# Altium PCB L-D5019-05-03.PcbDoc
Units mil, origin at the board's own origin, x right, y up, seen from the top; angles counter-clockwise.
Board outline 2874.02 x 1299.21 mil, 2 copper layers (Top Layer, Bottom Layer), stack 61.811 mil thick; 58 components, 38 nets, 174 pads, 53 vias.
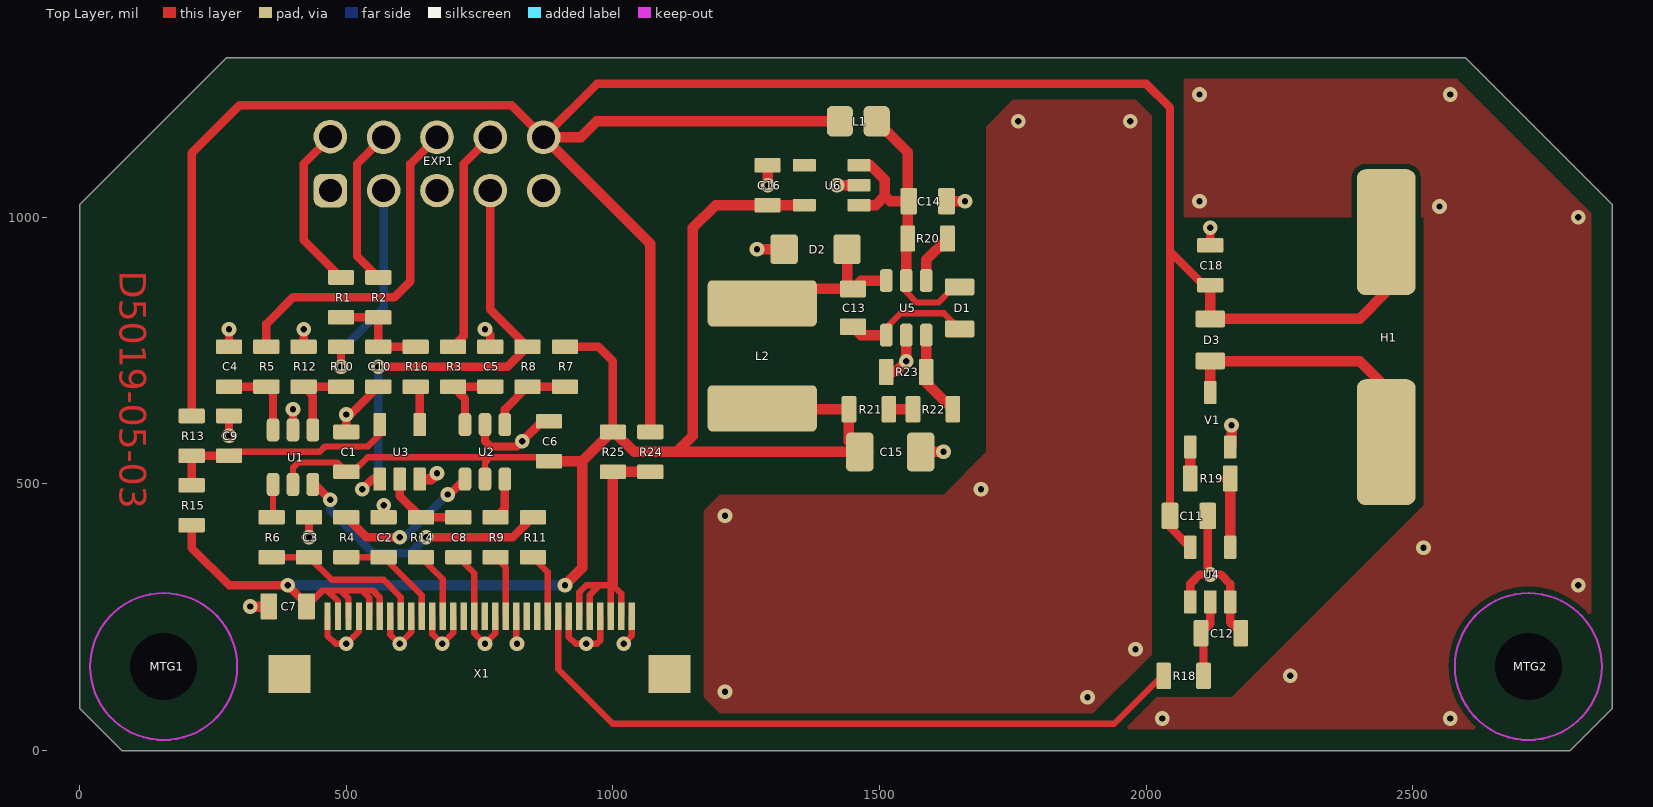
[diagram p0: Top Layer view]
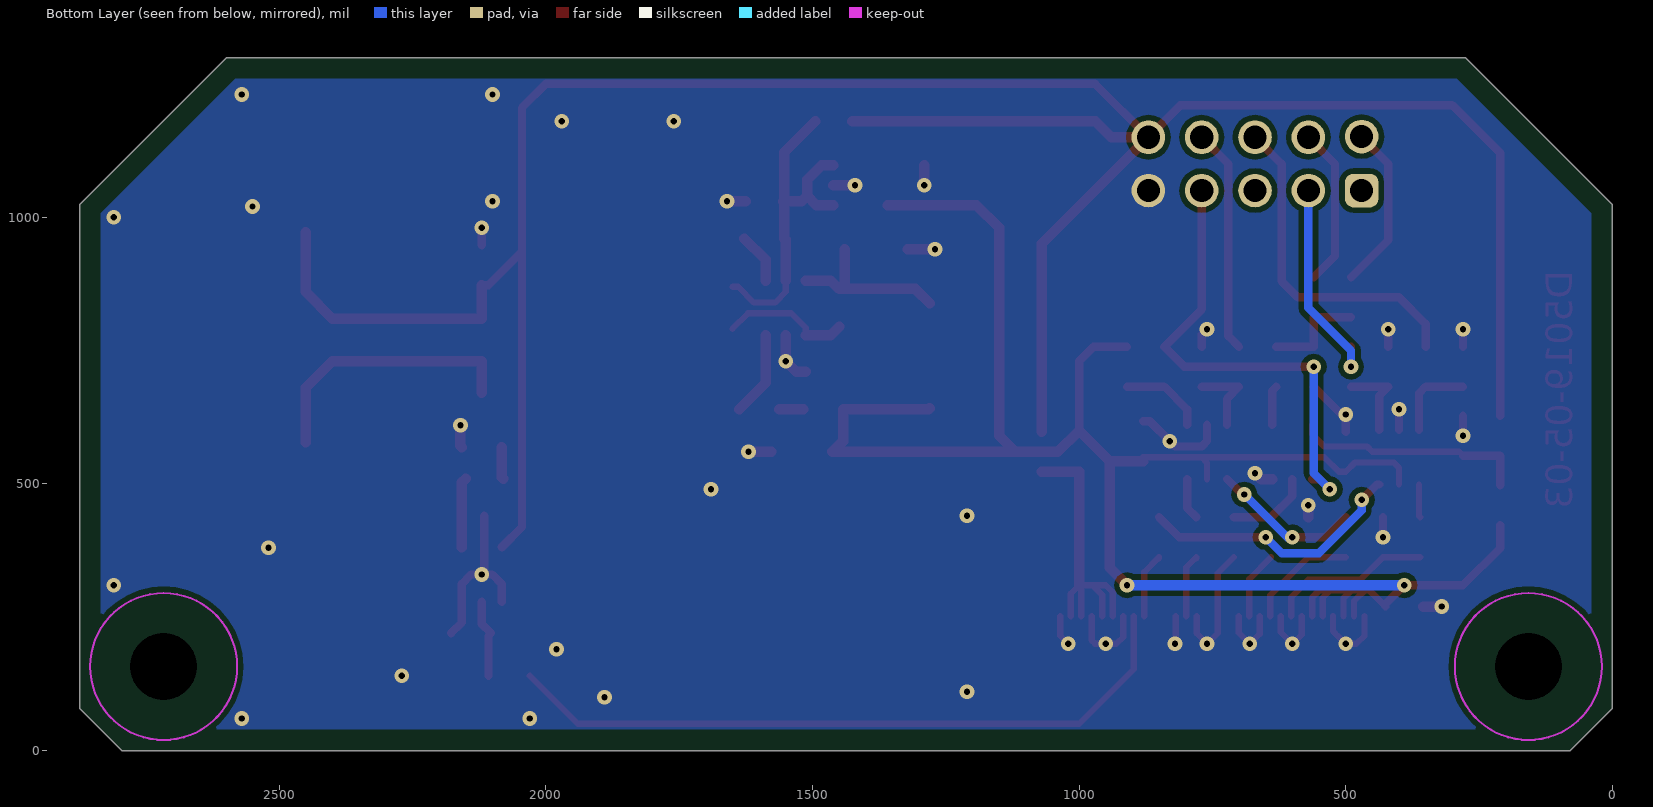
[diagram p1: Bottom Layer view, seen from below]
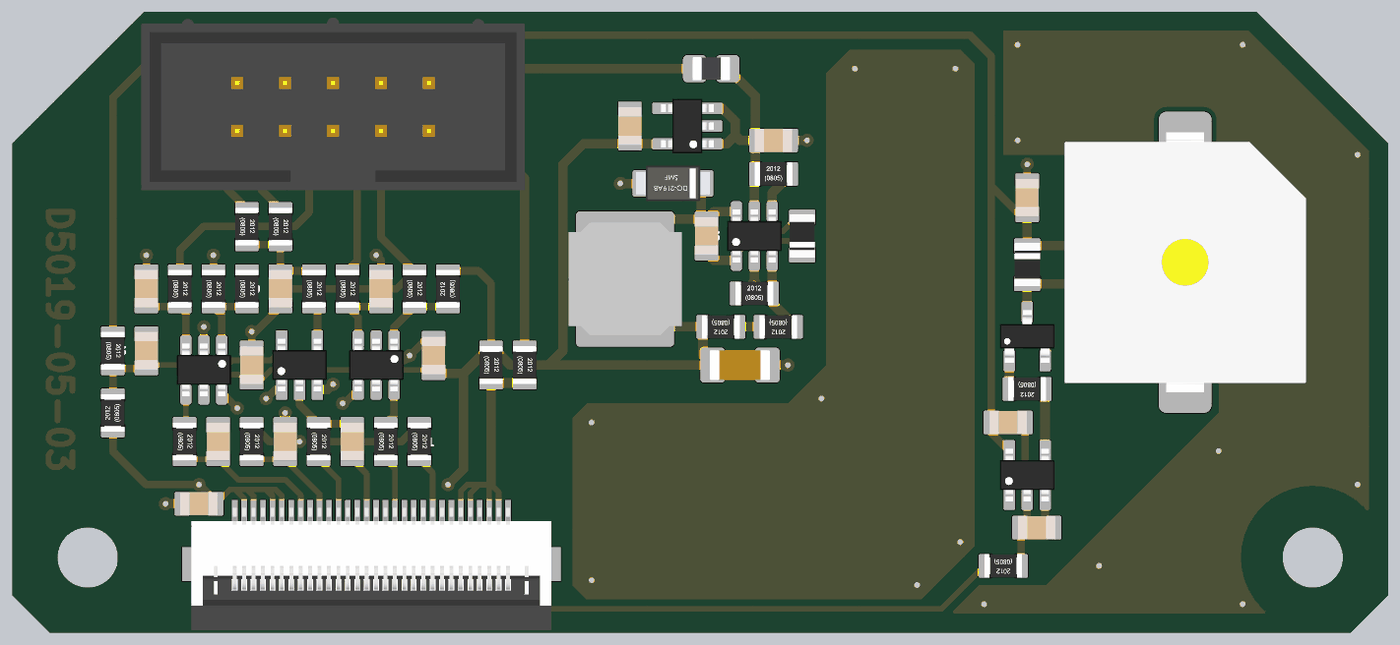
[diagram p2: 3D render of the assembled board from above, using the file's embedded part models]

## Layer stack, top to bottom
Top Solder: solder mask 0.3937, Solder Resist, Dk 3.5
Top Layer: signal copper 1.378
Dielectric 1: dielectric 59.0551, FR-4, Dk 4.8
Bottom Layer: signal copper 1.378
Bottom Solder: solder mask 0.3937, Solder Resist, Dk 3.5

## Board outline
78.74,0 0,78.74 0,1023.62 275.59,1299.21 2598.43,1299.21 2874.02,1023.62 2874.02,78.74 2795.28,0

## Design rules (kind name [scope] priority, off if disabled: settings)
BoardOutlineClearance [All] p1: gap=39.37 ignorepadtopadclearanceinfootprint=FALSE except(59.06: THPad-OutlineEdge THPad-CavityEdge THPad-CutoutEdge THPad-SplitBarrior THPad-SplitContinuation)
Clearance 16 [InNet('12V')] p1: gap=10 ignorepadtopadclearanceinfootprint=FALSE except(0: Arc-Hole Track-Hole SMDPad-Hole THPad-Hole Via-Hole Fill-Hole Poly-Hole Region-Hole Text-Hole; 16: Arc-Poly Track-Poly SMDPad-Poly THPad-Poly Via-Poly Fill-Poly Poly-Poly)
Clearance [All] p2: gap=6 ignorepadtopadclearanceinfootprint=FALSE except(0: Arc-Hole Track-Hole SMDPad-Hole THPad-Hole Via-Hole Fill-Hole Poly-Hole Region-Hole Text-Hole; 10: Arc-Poly Track-Poly SMDPad-Poly THPad-Poly Via-Poly Fill-Poly Poly-Poly) // 1
HoleSize [All] p1: absolutevalues=TRUE maxlimit=200 minlimit=11.81 maxpercent=80.000 minpercent=20.000
MinimumSolderMaskSliver [All] p1: minsoldermaskwidth=2
PasteMaskExpansion [All] p1 off: expansion=0
PolygonConnect [All] p1: connectstyle=Direct reliefconductorwidth=16 reliefentries=4 polygonreliefangle="90 Angle" airgapwidth=10
RoutingVias [All] p1: holewidth=11.81 width=23.62 viastyle="Through Hole" minholewidth=11.81 minwidth=23.62 maxholewidth=157.48 maxwidth=196.85
SilkToBoardRegionClearance [All] p1 off:
SilkToSilkClearance [All] p1 off: silktosilkclearance=10
SilkToSolderMaskClearance [IsPad] p1 off: minsilkscreentomaskgap=10 clearancetoexposedcopper=TRUE
SolderMaskExpansion [All] p1: expansion=2 istentingtop=FALSE
Width [All] p1: maxlimit=100 minlimit=8 preferedwidth=16 minimp=50.000000 maximp=50.000000 favimp=50.000000
24 further rules are at their usual default settings.

## Components (designator, comment, footprint, x,y, rotation, side; value= is the part's Value field where it differs from the comment)
C1 "100n" CAPC2012X14L#1 500,560 r270 top
C2 "22p" CAPC2012X14L#1 570,400 r270 top
C3 "22p" CAPC2012X14L#1 430,400 r270 top
C4 "22p" CAPC2012X14L#1 280,719.68 r270 top
C5 "22p" CAPC2012X14L#1 770,719.68 r270 top
C6 "100n" CAPC2012X14L#1 880,580 r270 top
C7 "4µ7" CAPC2012X14L#2 390,270 r0 top
C8 "22p" CAPC2012X14L#1 710,400 r90 top
C9 "100n" CAPC2012X14L#1 280,590 r270 top
C10 "22p" CAPC2012X14L#1 560,719.68 r90 top
C11 "100n" CAPC2012X14L#2 2080,440 r180 top
C12 "DNP" CAPC2012X14L#1 2140,220 r180 top
C13 "100n" CAPC2012X14L#2 1450,830 r90 top
C14 "4µ7" CAPC2012X14L#2 1590,1030 r180 top
C15 "22µF" CAPC3216X19N 1520,560 r180 top
C16 "4µ7" CAPC2012X14L#1 1290,1060 r270 top
C18 "4µ7" CAPC2012X14L#1 2120,910 r270 top
D1 "TS4148 RY" DIOC2012X10N 1650,830 r90 top
D2 "ES07D" DIOM2818X11N 1380,940 r180 top
D3 "TS4148 RY" DIOC2012X10N 2120,770 r270 top
EXP1 "2x5 2,54mm" PINH_2x5_2_54mm_shroud 670,1100 r0 top
H1 "CT-1205H-SMT" CT-1205H-SMT 2450,775 r270 top
L1 "0R0" INDC2012X10L 1460,1180 r0 top
L2 "VLS6045AF-4R7M" POWERINDUCTOR_6X6 1280,740 r270 top
MTG1 "MH_M3" HOLE_3_2MM 157.48,157.48 r0 top
MTG2 "MH_M3" HOLE_3_2MM 2716.54,157.48 r0 top
R1 "DNP" RESC2012X06L 490,849.68 r270 top
R2 "0R0" RESC2012X06L 560,849.68 r270 top
R3 "10R" RESC2012X06L 700,719.68 r270 top
R4 "10R" RESC2012X06L 500,400 r270 top
R5 "10R" RESC2012X06L 350,719.68 r270 top
R6 "10R" RESC2012X06L 360,400 r270 top
R7 "10k" RESC2012X06L 910,719.68 r90 top
R8 "10R" RESC2012X06L 840,719.68 r270 top
R9 "10R" RESC2012X06L 780,400 r270 top
R10 "10R" RESC2012X06L 490,719.68 r270 top
R11 "10R" RESC2012X06L 850,400 r270 top
R12 "10k" RESC2012X06L 420,719.68 r270 top
R13 "DNP" RESC2012X06L 210,590 r270 top
R14 "10R" RESC2012X06L 640,400 r270 top
R15 "0R0" RESC2012X06L 210,460 r90 top
R16 "10R" RESC2012X06L 630,719.68 r270 top
R18 "0r0" RESC2012X06L 2070,140 r180 top value=0R0
R19 "1k" RESC2012X06L 2120,510 r180 top
R20 "10k" RESC2012X06L 1590,960 r0 top
R21 "22k" RESC2012X06L 1480,640 r180 top
R22 "10k" RESC2012X06L 1600,640 r180 top
R23 "10k" RESC2012X06L 1550,710 r0 top
R24 "0R0" RESC2012X06L 1070,560 r270 top
R25 "DNP" RESC2012X06L 1000,560 r270 top
U1 "74LVC2G17" SOT95P280X110-6N 400,550 r270 top
U2 "74LVC2G17" SOT95P280X110-6N 760,560 r270 top
U3 "74VHC1GT125" SOT95P280X110-5N 600,560 r90 top
U4 "74VHC1GT125" SOT95P280X110-5N 2120,330 r90 top
U5 "RT8259GE" SOT95P280X110-6N 1550,830 r90 top
U6 "MIC5504-3.3YM5" SOT95P280X110-5N 1410,1060 r180 top
V1 "BC817" SOT95P280X110-3N 2120,620 r90 top
X1 "WE_687130149022" WE_687130149022 750,120 r0 top

## Footprints (in the part's own frame and the unit in brackets; to place one, negate y for a bottom-side part, rotate by r counter-clockwise, add the part's x,y. Pads: shape width x height; smd on the part's side, far side on the other; paste and mask are expansions set on the pad)
CAPC2012X14L#1 [mm] "Chip Capacitor, 2-Leads, Body 2,0x1,3mm, IPC High Density"
  rrect20% 0.7x1.25 smd: 1(-0.95,0) 2(0.95,0)
  body extent -1,-0.62 1,0.62, height 0.6
CAPC2012X14L#2 [mm] "Chip Capacitor, 2-Leads, Body 2,0x1,3mm, IPC High Density"
  rrect20% 0.8x1.25 smd: 1(-0.9,0) 2(0.9,0)
  body extent -1,-0.62 1,0.62, height 0.6
CAPC3216X19N [mm] "Chip Capacitor, 2-Leads, Body 3,2x1,6mm, IPC Medium Density"
  rrect30% 1.3x1.85 smd: 1(-1.45,0) 2(1.45,0)
  body extent -1.6,-0.8 1.6,0.8, height 1
CT-1205H-SMT [mm] "Speaker"
  rrect30% 6x2.8 smd: 1(-5,0) 2(5,0)
  body extent -6.9,-6.4 6.9,6.4, height 10
DIOC2012X10N [mm] "Chip Diode, 2-Leads, Body 2,0x1,3mm, IPC Medium Density"
  rrect20% 0.8x1.4 smd: 1(-1,0) 2(1,0)
  body extent -1.15,-0.68 1.15,0.68, height 0.76
DIOM2818X11N [mm] "Molded Diode, 2-Leads, Body 2,80x1,80mm, IPC Medium Density"
  rrect20% 1.3x1.4 smd: 1(-1.5,0) 2(1.5,0)
  body extent -1.95,-0.95 1.95,0.95, height 1.25
HOLE_3_2MM [mm] "Mouting-Hole for screws M3 with keepout for washer"
  round 0 hole 3.2 unplated: 1(0,0)
  Keep-Out Layer circle w0.1: c0,0 r3.5
INDC2012X10L [mm] "Ferrite Bead, 2-Leads, Body 2,0x1,3mm, IPC High Density"
  rrect40% 1.25x1.45 smd: 1(-0.875,0) 2(0.875,0)
  body extent -1,-0.62 1,0.62, height 0.85
PINH_2x5_2_54mm_shroud [mm] "10 pins, straight, gold plating"
  rrect50% 1.6x1.6 hole 1.1: 1(-5.08,-1.27)
  round 1.6 hole 1.1: 2(-5.08,1.3) 3(-2.54,-1.27) 4(-2.54,1.27) 5(0,-1.27) 6(0,1.27) 7(2.54,-1.27) 8(2.54,1.27) 9(5.08,-1.27) 10(5.08,1.27)
  body extent -10.18,-4.42 10.18,4.75, height 9.13
POWERINDUCTOR_6X6 [mm] "SMD Inductor, 2-Leads, Body 6,0x6.0mm"
  rrect20% 2.2x5.2 smd: 1(-2.5,0) 2(2.5,0)
  body extent -3,-3 3,3, height 4
RESC2012X06L [mm] "Chip Resistor, 2-Leads, Body 2,0x1,3mm, IPC High Density"
  rrect20% 0.7x1.25 smd: 1(-0.95,0) 2(0.95,0)
  body extent -1,-0.62 1,0.62, height 0.45
SOT95P280X110-3N [mm] "SOT23, 3-Leads, Body 3,0x3,0mm (max), Pitch 0,95mm, IPC Medium Density"
  rrect20% 1.1x0.6 smd: 1(-1.3,0.95) 2(-1.3,-0.95) 3(1.3,0)
  body extent -1.4,-1.45 1.4,1.45, height 1.3
SOT95P280X110-5N [mm] "SOT23, 5-Leads, Body 3,0x3,0mm (max), Pitch 0,95mm, IPC Medium Density"
  rrect20% 1.1x0.6 smd: 1(-1.3,0.95) 2(-1.3,0) 3(-1.3,-0.95) 4(1.3,-0.95) 5(1.3,0.95)
  body extent -1.4,-1.45 1.4,1.45, height 1.45
SOT95P280X110-6N [mm] "SOT23, 6-Leads, Body 3,0x3,0mm (max), Pitch 0,95mm, IPC Medium Density"
  rrect50% 1.1x0.6 smd: 1(-1.3,0.95) 2(-1.3,0) 3(-1.3,-0.95) 4(1.3,-0.95) 5(1.3,0) 6(1.3,0.95)
  body extent -1.4,-1.45 1.4,1.45, height 1.45
WE_687130149022 [mm] "0.50mm SMT ZIF Horizontal Hinge Type Bottom Contact, 30p"
  rect 0.3x1.3 smd: 1(-7.25,3.35) 2(-6.75,3.35) 3(-6.25,3.35) 4(-5.75,3.35) 5(-5.25,3.35) 6(-4.75,3.35) 7(-4.25,3.35) 8(-3.75,3.35) 9(-3.25,3.35) 10(-2.75,3.35) 11(-2.25,3.35) 12(-1.75,3.35) 13(-1.25,3.35) 14(-0.75,3.35) 15(-0.25,3.35) 16(0.25,3.35) 17(0.75,3.35) 18(1.25,3.35) 19(1.75,3.35) 20(2.25,3.35) 21(2.75,3.35) 22(3.25,3.35) 23(3.75,3.35) 24(4.25,3.35) 25(4.75,3.35) 26(5.25,3.35) 27(5.75,3.35) 28(6.25,3.35) 29(6.75,3.35) 30(7.25,3.35)
  rect 2x1.8 smd: MH1(-9.05,0.6) MH2(9.05,0.6)
  body extent -9.55,-2.9 9.55,3.6, height 2.25

## Part data
C1 C2 C3 C4 C5 C6 C7 C8 C9 C10 C11 C12 C13 C14 C16 C18: library part CAPC_0805, "0805 Chip Capacitor", PackageDescription=0805, Part Number=CAPC_0805
  C1 C2 C3 C4 C5 C6 C8 C9 C10 C11 C12 C13: Bauteilart=Capacitor, Editor=rriedel, Kategorie=generic, Status=tested, Unterart=unpolarized
  C7 C14: Category=generic, Editor=rriedel, Group=Capacitor, Status=tested, Subgroup=unpolarized
  C16 C18: Bauteilart=Kondensator, Ersteller=rriedel, Freigabe=unchecked, ID=894, Kategorie=generisch, Mounting=SMT, Polar=u, timestamp="17.08.2016 13:43:45", Unterart=ungepolt
C15: library part CAPC_1206, "1206 Chip Capacitor", Bauteilart=Capacitor, Editor=rriedel, Kategorie=generic, PackageDescription=1206, Part Number=CAPC_1206, Status=tested, Unterart=unpolarized
D1 D3: library part "TSC_TS4148 RY", "Small Signal Diode IF 0.3A, VR 75V, 0805", Manufacturer=TSC, Bauteilart=Diode, Date=09.10.2013, Editor=rriedel, Kategorie=Part, PackageDescription=0805, Part Number="TSC_TS4148 RY", Part_Number_1="TS4148 RY", Status=tested, Unterart="Small Signal"
D2: "Ultrafast Rectifier Surface Mount,  IF 0.5A, VR 100V, DO-219AB, AEC-Q101", Manufacturer=Vishay, Bauteilart=Diode, Date=09.10.2013, Editor=rriedel, Kategorie=Part, PackageDescription=DO-219AB, Part Number=ES07D, Part_Number_1=ES07D, Status=tested, Unterart=Rectifier
EXP1: library part PINH_2x5_2_54, "Pin-Header 2,54 mm 2x5pins, shrouded", Bauteilart=Connector, Date=31.03.2019, Editor=rriedel, Kategorie=generic, Part Number=PINH_2x5_2_54, Status=tested, Unterart=Pin-Header
H1: "Speaker, Magnetic, 47R, 60mA, 88dBA, SMT, 12.8 x 12.8 mm,  height 10 mm", Manufacturer=CUI, Bauteilart=Electromechanical, Date=10.06.2020, Distributor_1=Digi-Key, Distributor_1_Part_Number=102-1266-1-ND, Editor=rriedel, Kategorie=Part, PackageDescription="SMT, 13x13", Part Number=CT-1205H-SMT, Part_Number_1=CT-1205H-SMT-TR, Status=new, Unterart=Speaker
L1: library part INDC_0805, "0805 Chip Inductor", Bauteilart=Inductor, Date=31.03.2019, Editor=rriedel, Kategorie=generic, PackageDescription=0805, Part Number=INDC_0805, Status=tested, Unterart=generic
L2: "4,7µH, shielded, 4,7A, 26mR", Manufacturer=TDK, Bauteilart=Inductor, Date=31.03.2019, Distributor_1=Digi-Key, Distributor_1_Part_Number=445-180835-1-ND, Editor=rriedel, Kategorie=Part, PackageDescription="6x6 mm", Part Number=VLS6045AF-4R7M, Part_Number_1=VLS6045AF-4R7M, Status=tested, Unterart=Power
MTG1 MTG2: "Mounting-Hole for M3 screws", Bauteilart=Mechanic, Date=13.05.2018, Editor=rriedel, Kategorie=No_Bom, Part Number=MH_M3, Status=tested, Unterart=Holes
R1 R2 R3 R4 R5 R6 R7 R8 R9 R10 R11 R12 R13 R14 R15 R16 R18 R19 R20 R21 R22 R23 R24 R25: library part RESC_0805, "0805 Chip Resistor", Bauteilart=Resistor, Editor=rriedel, Kategorie=generic, PackageDescription=0805, Part Number=RESC_0805, Status=tested, Unterart=generic
U1 U2: "Dual Schmitt-Trigger Buffer with 5.5V tolerant inputs", Manufacturer=TI, Bauteilart=IC, Date=08.05.2020, Distributor_1=Digi-Key, Distributor_1_Part_Number=296-SN74LVC2G17DBVRCT-ND‎, Editor=rriedel, Kategorie=Part, PackageDescription=SOT23-6, Part Number=74LVC2G17, Part_Number_1=74LVC2G17DBVR, Status=tested, Unterart=Logic
U3 U4: "1x Buffer with OE; 3-state,Level Shifter 3,3V to 5V and 5V to 3.3V", Manufacturer="ON Semiconductor", Bauteilart=IC, Date=21.01.2011, Distributor_1=Farnell, Distributor_1_Part_Number=1703291, Editor=rriedel, Kategorie=Part, PackageDescription=SOT23-5, Part Number=74VHC1GT125, Part_Number_1=M74VHC1G125DT1G, Status=tested, Unterart=Logic
U5: "Step-Down DC/DC Regulator, 24V, 1.2A, 1,4MHz", Manufacturer=Richtek, Bauteilart=IC, Date=31.03.2019, Distributor_1=Digi-Key, Distributor_1_Part_Number=1028-1497-1-ND, Editor=rriedel, Kategorie=Part, PackageDescription=SOT23-6, Part Number=RT8259GE, Part_Number_1=RT8259GE, Status=tested, Unterart=Switching-Regulators
U6: "300 mA LDO,  Vin=2,5V…5,5V, Vout= 3,3V, -40°C..125°C", Manufacturer=Microchip, Bauteilart=IC, Date=23.05.2019, Distributor_1=Farnell, Distributor_1_Part_Number=2510377, Editor=rriedel, Kategorie=Part, PackageDescription=SOT23-5, Part Number=MIC5504-3.3YM5, Part_Number_1=MIC5504-3.3YM5, Status=tested, Unterart=Linear-Regulators
V1: "NPN Transistor SOT23, 1=B, 2=C, 3=E", Bauteilart=Transistor, Date=23.05.2020, Editor=rriedel, Kategorie=Part, PackageDescription=SOT23, Part Number=BC817, Status=tested, Unterart=NPN
X1: "30pin WR-FPC 0.50 mm SMT ZIF Horizontal - Bottom Contact", Manufacturer=Wuerth, Bauteilart=Connector, Date=25.05.2020, Distributor_1=Digi-Key, Distributor_1_Part_Number=732-6007-1-ND, Editor=rriedel, Kategorie=Part, PackageDescription="FPC 0.5mm", Part Number=WE_687130149022, Part_Number_1=6.8713014902e+011, Status=tested, Unterart=FPC

## Via types
v1: diameter 27.56, hole 11.81, Top Layer to Bottom Layer, tented both sides, 53 vias

## Nets (pads, with @x,y where several pads share a name; then routed paths per layer and width w, separated by ;. In a path a pad name is that pad's centre, name@x,y a point inside that pad or via, vN(x,y) a via of type N, cw(c..) or ccw(c..) an arc to the next point about the centre after c; other vN are vias at no path point)
3V3: C1.2 C6.2 C7.2 C15.2 C16.2 L2.2 R7.2 R15.1 R21.2 R25.1 U1.5 U2.5 U6.5 X1.2 X1.3 X1.5 X1.6 | length 3770.8
  Top Layer w11.81: U1.5 400,530 410,540 482.6,540 C1.2 512.6,522.6 540,550 770,550 ; C7.2 455.43,300 464.79,300 ; X1.2 484.25,280.54 464.79,300 ; X1.3 503.94,286.06 490,300 ; X1.5 543.31,286.69 530,300 ; X1.6 562.99,287.01 550,300 530,300 ; U2.5 760,540 770,550 ; C6.2@880,550 770,550 ; 464.79,300 490,300 ; 490,300 530,300
  Top Layer w15.75: R15.1 210,380 280,310 v1(390,310) 425.43,274.57 C7.2 ; R7.2 972.91,757.09 1000,730 R25.1@1000,600
  Top Layer w19.68: C6.2 942.6,542.6 ; v1(910,310) 942.6,342.6 942.6,542.6 ; L2.2 1281.57,640 R21.2 1442.6,580.31 C15.2 1120,560 ; U6.5 C16.2 1192.6,1022.6 1150,980 1150,590 1120,560 ; 942.6,542.6 1000,600 1040,560 1120,560
  Bottom Layer w19.68: v1(390,310) v1(910,310)
5V: C11.2 C18.2 D3.1 EXP1.10 H1.1 L1.1 R13.1 R24.1 U4.5 | length 5120.1
  Top Layer w15.75: R13.1 210,1120 300,1210 810,1210 EXP1.10 970,1250 2000,1250 2044.57,1205.43 2044.57,935.43 ; U4.5 2044.57,419.21 C11.2 2044.57,935.43 ; C18.2 2107.4,872.6 2044.57,935.43
  Top Layer w19.68: R24.1 1070,950 EXP1.10 940,1150 970,1180 L1.1 ; C18.2 D3.1 2120.63,810 2400,810 2450,860 H1.1
Audio: R18.2 X1.23 | length 1311.7
  Top Layer w11.81: X1.23 897.64,152.36 1000,50 1940,50 R18.2@2030.1,140.1
CS_TFT_3V3: R9.2 X1.18 | length 121.3
  Top Layer w11.81: R9.2@780,360 R9.2 799.21,343.39 X1.18
GND: C1.1 C2.1 C3.1 C4.1 C5.1 C6.1 C7.1 C8.1 C9.1 C10.1 C11.1 C12.1 C14.1 C15.1 C16.1 C18.1 D2.2 EXP1.9 R12.1 R23.1 U1.2 U2.2 U3.3 U4.1 U4.3 U5.2 U6.2 V1.2 X1.1 X1.4 X1.7 X1.9 X1.11 X1.13 X1.15 X1.17 X1.19 X1.24 X1.27 X1.30 | length 2198.2
  Top Layer w11.81: X1.1 464.57,215.43 480,200 v1(500,200) 514.39,214.39 514.77,214.39 521.75,221.37 521.75,221.75 523.62,223.62 X1.4 ; X1.7 582.68,217.32 v1(600,200) 622.05,222.05 X1.9 ; X1.11 661.42,218.58 v1(680,200) 700.79,220.79 X1.13 ; C8.1 740.16,332.44 X1.15 740.16,219.84 v1(760,200) 779.53,219.53 X1.17 ; X1.19 818.9,201.1 v1(820,200) ; X1.24 917.32,212.68 930,200 v1(950,200) 970,200 976.38,206.38 X1.27 ; v1(1020,200) 1035.43,215.43 X1.30
  Top Layer w15.75: v1(280,590) C9.1 ; C4.1 v1(280,790) ; U1.2 v1(400,640) ; R12.1 v1(420,790) ; v1(430,400) C3.1 ; C1.1 v1(500,630) 507.72,630 C10.1 ; U2.2 760,580 770,570 820,570 v1(830,580) 867.4,617.4 C6.1 ; v1(760,790) 770,780 C5.1 ; U4.1 2082.6,312.6 2100,330 v1(2120,330) ; C11.1 2115.43,334.57 v1(2120,330) ; C18.1 v1(2120,980) ; C12.1 2157.4,240 U4.3 2157.4,312.6 2140,330 v1(2120,330)
  Top Layer w19.68: v1(320,270) C7.1 ; C2.1 v1(570,460) ; U3.3 658.82,508.82 v1(670,520) ; v1(1270,940) D2.2 ; v1(1290,1060) C16.1 ; v1(1420,1060) U6.2 ; R23.1 1530,710 v1(1550,730) U5.2 ; C15.1 v1(1620,560) ; C14.1 v1(1660,1030) ; V1.2 2160,571.42 v1(2160,610)
  other v1: 2030,60 2570,60 1890,100 1210,110 2270,140 1980,190 2810,310 2520,380 1210,440 1690,490 2810,1000 2550,1020 2100,1030 1760,1180 1970,1180 2100,1230 2570,1230
MISO_3V3: R14.2 X1.12 | length 127.7
  Top Layer w11.81: R14.2 681.1,321.5 X1.12
MOSI_3V3: C2.2 R4.2 X1.10 | length 210.4
  Top Layer w11.81: R4.2 C2.2 641.73,290.87 X1.10
NetC4_2: C4.2 R5.2 U1.3 | length 156.3
  Top Layer w15.75: C4.2 R5.2 362.6,669.68 U1.3
NetC5_2: C5.2 R3.2 U2.3 | length 150.5
  Top Layer w15.75: U2.3 722.6,659.68 R3.2 C5.2
NetC8_2: C8.2 R14.1 U3.2 | length 158
  Top Layer w15.75: U3.2 600,477.4 R14.1 C8.2
NetC9_2: C9.2 R13.2 R15.2 U3.5 | length 442.9
  Top Layer w11.81: C9.2 287.4,560 450,560 460,570 540,570 562.6,592.6 U3.5
  Top Layer w15.75: R15.2 R13.2 C9.2
NetC12_2: C12.2 R18.1 U4.2 | length 148
  Top Layer w15.75: R18.1 2107.4,215.2 C12.2 2120,237.4 U4.2
NetC13_1: C13.1 D1.1 U5.1 | length 243.8
  Top Layer w11.81: U5.1 1512.6,792.6 1540,820 1620.63,820 D1.1
  Top Layer w19.68: C13.1 1465.75,778.82 U5.1
NetC13_2: C13.2 D2.1 L2.1 U5.6 | length 329.4
  Top Layer w19.68: L2.1 1307.01,865.43 C13.2 ; D2.1 1439.06,876.38 C13.2 ; U5.6 1465.75,881.18 C13.2
NetC14_2: C14.2 D1.2 L1.2 R20.1 U5.5 U6.1 U6.3 | length 660.5
  Top Layer w11.81: U5.5 1550,860 1570,840 1610,840 1639.37,869.37 D1.2
  Top Layer w19.68: U6.1 1492.6,1022.6 1510,1040 ; U6.3 1482.6,1097.4 1510,1070 1510,1040 ; L1.2 1552.6,1121.85 C14.2@1552.6,1030 ; U5.5 1550,957.4 R20.1 C14.2@1552.6,1030 ; C14.2 C14.2@1552.6,1030 ; 1510,1040 1520,1030 C14.2@1552.6,1030
NetD3_2: D3.2 H1.2 V1.3 | length 511.4
  Top Layer w19.68: V1.3 2120,730 2400,730 2450,680 H1.2
NetEXP1_2: EXP1.2 R1.1 | length 312.6
  Top Layer w15.75: EXP1.2@470,1150 420,1100 420,957.09 R1.1
NetEXP1_4: EXP1.4 R2.1 | length 300.2
  Top Layer w15.75: R2.1 520,927.09 520,1100 EXP1.4
NetR4_1: R4.1 U2.4 | length 283.2
  Top Layer w15.75: R4.1 537.4,400 v1(600,400) ; v1(690,480) 693.78,480 U2.4
  Bottom Layer w15.75: v1(600,400) 610,400 v1(690,480)
NetR6_1: R6.1 U1.4 | length 62.5
  Top Layer w11.81: R6.1 362.6,440 U1.4
NetR7_1: R7.1 R8.2 U2.1 | length 158.7
  Top Layer w15.75: U2.1 797.4,639.69 R8.2 R7.1
NetR9_1: R9.1 U2.6 | length 78.6
  Top Layer w15.75: R9.1 797.4,454.8 U2.6
NetR10_2: R10.2 R12.2 U1.1 | length 158.3
  Top Layer w15.75: U1.1 437.4,664.88 R12.2 R10.2
NetR11_1: R11.1 U1.6 | length 505.6
  Top Layer w15.75: U1.6 441.18,498.82 v1(470,470) ; v1(650,400) 812.6,400 R11.1
  Bottom Layer w15.75: v1(470,470) 470,450 550,370 620,370 v1(650,400)
NetR16_2: R16.2 U3.4 | length 74.2
  Top Layer w15.75: R16.2 637.4,674.88 U3.4
NetR19_1: R19.1 U4.4 | length 131.9
  Top Layer w19.68: R19.1@2150,510 2157.4,502.6 U4.4
NetR19_2: R19.2 V1.1 | length 59.9
  Top Layer w19.68: R19.2@2080,510 2082.6,512.6 V1.1
NetR20_2: R20.2 U5.4 | length 95.4
  Top Layer w19.68: U5.4 1587.4,920 R20.2
NetR21_1: R21.1 R22.2 | length 45.2
  Top Layer w19.68: R21.1 R22.2
NetR22_1: R22.1 R23.2 U5.3 | length 159.5
  Top Layer w19.68: U5.3 R23.2 1587.4,690 R22.1
NetR24_2: R24.2 R25.2 X1.25 X1.26 X1.28 X1.29 | length 586.2
  Top Layer w11.81: X1.25 937.01,297.01 950,310 975,310 ; X1.26 956.69,291.69 975,310 ; X1.28 996.06,306.06 1000,310 ; X1.29 1015.75,294.25 1000,310 ; 975,310 1000,310
  Top Layer w19.68: 1000,310 R25.2 R24.2
PD_TFT_3V3: R11.2 X1.22 | length 124.9
  Top Layer w11.81: R11.2@850,360 R11.2 877.95,334.65 X1.22
SCK_3V3: C3.2 R6.2 X1.8 | length 309.2
  Top Layer w11.81: R6.2 C3.2 472.6,320 570,320 602.36,287.64 X1.8
X_CS_TFT: EXP1.7 R8.1 U3.1 | length 899.9
  Top Layer w15.75: v1(530,490) 548.82,508.82 U3.1 ; v1(560,719.68) 802.6,719.68 R8.1 770,827.09 EXP1.7
  Bottom Layer w15.75: v1(530,490) 560,520 v1(560,719.68)
X_MISO: C10.2 R1.2 R2.2 R16.1 | length 195.2
  Top Layer w15.75: R1.2 R2.2 C10.2 R16.1
X_MOSI: EXP1.8 R3.1 | length 421.9
  Top Layer w15.75: R3.1 720,777.09 720,1100 EXP1.8
X_PD_TFT: EXP1.3 R10.1 | length 400.9
  Top Layer w15.75: v1(490,719.69) R10.1
  Bottom Layer w15.75: v1(490,719.69) 490,750 570,830 EXP1.3
X_SCK: EXP1.6 R5.1 | length 636.8
  Top Layer w15.75: R5.1 350,800 400,850 590,850 620,880 620,1100 EXP1.6
pads on no net: EXP1.1 EXP1.5 MTG1.1 MTG2.1 U6.4 X1.14 X1.16 X1.20 X1.21 X1.MH1 X1.MH2

## Polygon pours and split planes (outlines as drawn)
GND on Top Layer "GND_L01_P002" (solid, pour order 2): 2020,100 1960,40 2910,40 2910,1040 2620,1330 2550,1260 2210,1260 2070,1260 2070,1000 2520,1000 2520,460 2160,100
GND on Top Layer "GND_L01_P001" (solid, pour order 1): 1200,70 1170,100 1170,450 1200,480 1620,480 1700,560 1700,1170 1750,1220 1980,1220 2010,1190 2010,180 1900,70
GND on Bottom Layer "GND_L02_P000" (solid, remove dead copper, pour order 0): -39.37,1506.68 -39.37,10 2870.63,10 2880.63,20 2880.63,1496.68

## Other copper
Top Layer:
  pour cut-out: 2578.74,157.48 ccw(c2716.54,157.48) 2716.54,19.68 ccw(c2716.54,157.48) 2854.33,157.48 ccw(c2716.54,157.48) 2716.54,295.28 ccw(c2716.54,157.48)
  text "D5019-05-03" at 75,900 h50 r270

## Silkscreen, mask and mechanical layers (free items; w line width, h text height)
M1_Dimension:
  the board outline again, w10

## Dimensions
2874.02,1023.62 to 0,1023.62 on M2_Measures
2874.02,0 to 275.59,1299.21 on M2_Measures
157.48,157.48 to 2716.54,157.48 on M2_Measures